# Altium PCB PCB2.PcbDoc (part 3 of 3)
Units mil, origin at the board's own origin, x right, y up, seen from the top; angles counter-clockwise.
Board outline 7874.02 x 7874.02 mil, 2 copper layers (Top Layer, Bottom Layer); 456 components, 298 nets, 1240 pads, 257 vias.
Unrouted connection lines stored in the file: 581.
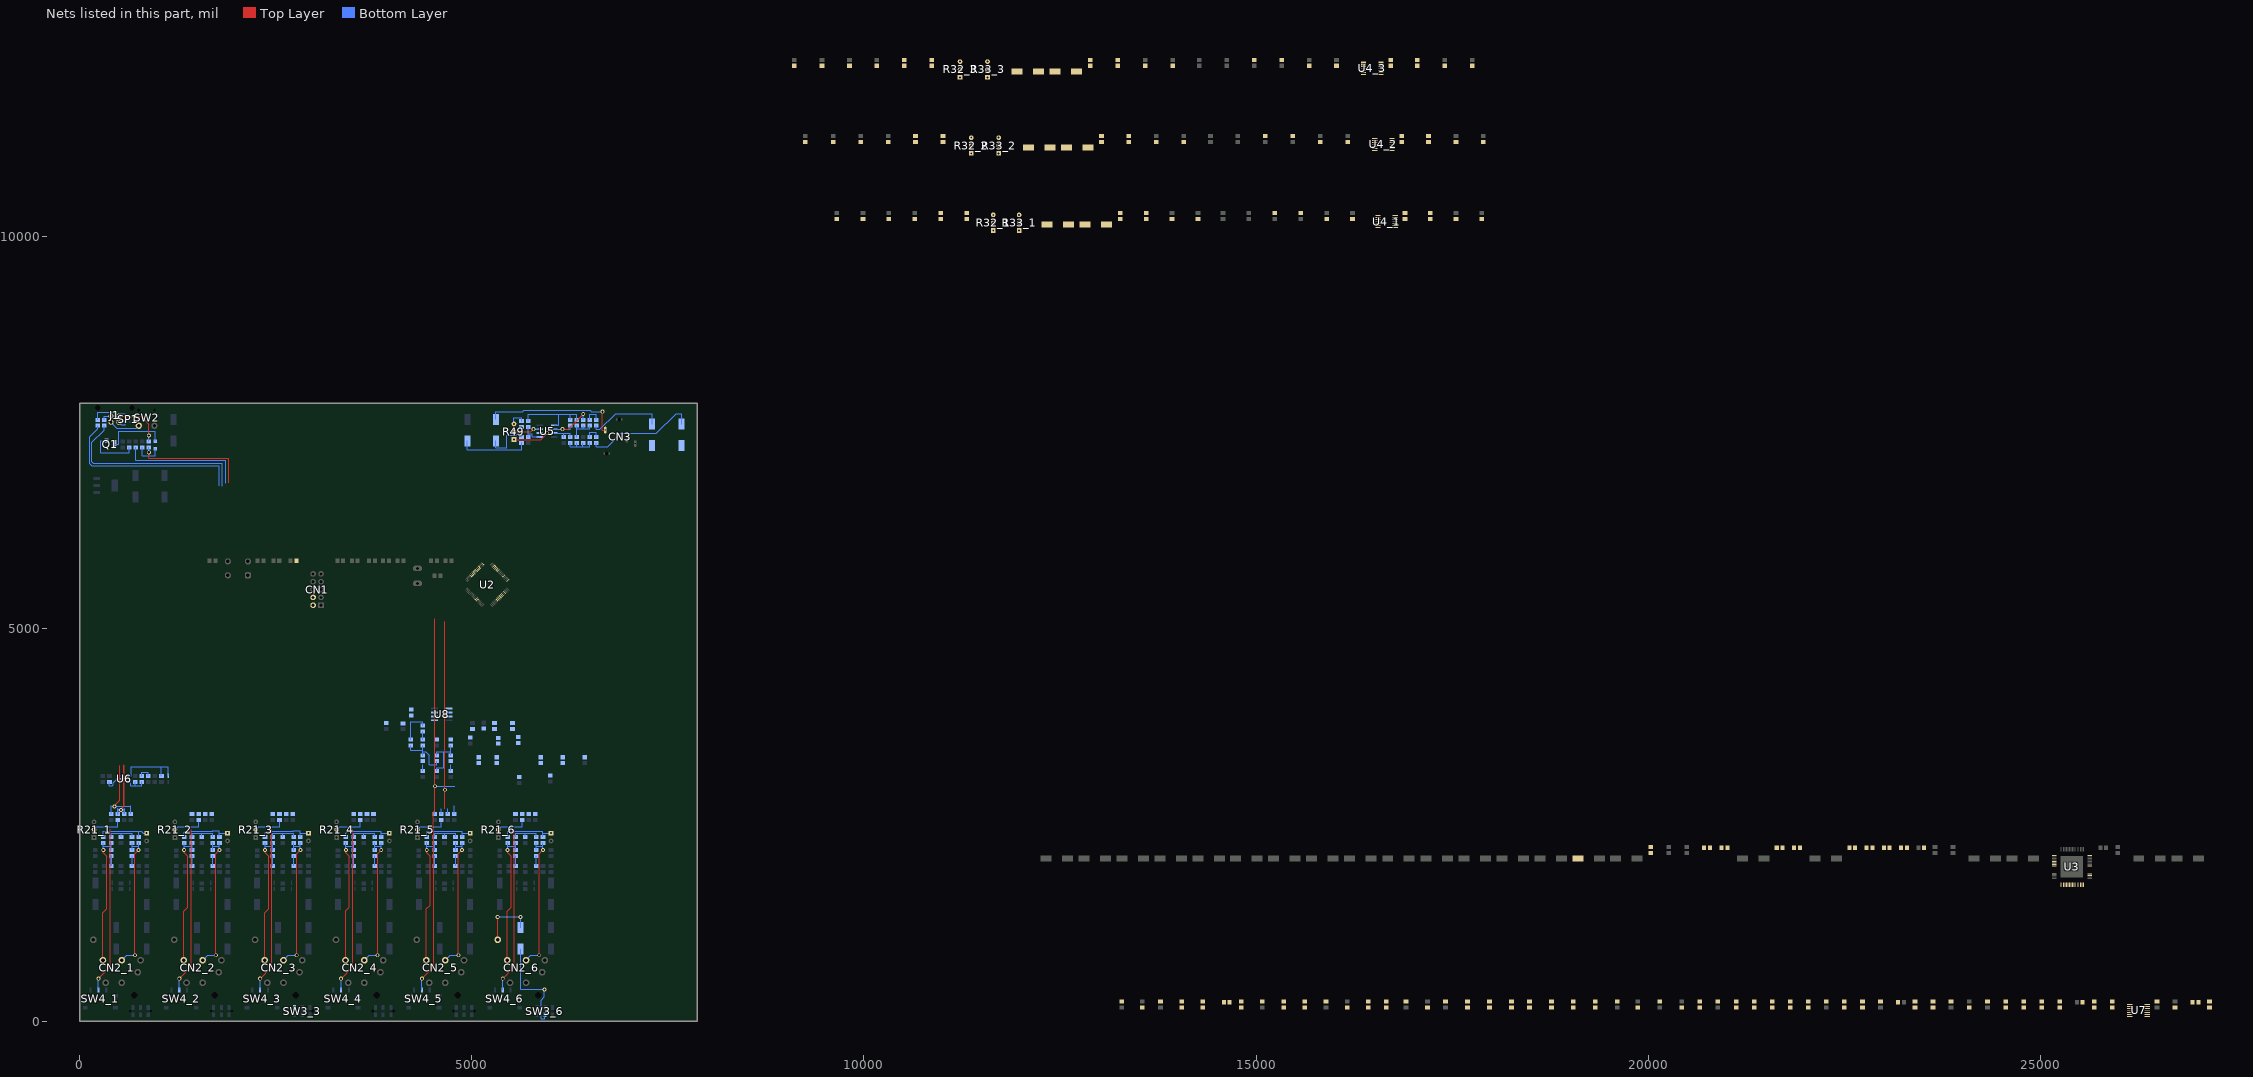
[diagram p3: the nets of this part, all layers, seen from the top]

## Via types
v1: diameter 50, hole 28, Top Layer to Bottom Layer, 253 vias
v2: diameter 55.12, hole 27.56, Top Layer to Bottom Layer, 4 vias

## Nets (pads, with @x,y where several pads share a name; then routed paths per layer and width w, separated by ;. In a path a pad name is that pad's centre, name@x,y a point inside that pad or via, vN(x,y) a via of type N, cw(c..) or ccw(c..) an arc to the next point about the centre after c; other vN are vias at no path point) (continued)
NetC48_6_1: C48_6.1 SW3_6.5 | length 1310.5
  Bottom Layer w15: C48_6.1@5622.54,916.15 5622.54,656.99 5622.54,403.54 v1(5927.66,403.54) 5927.66,310.04 5883.37,265.75 5883.37,29.53 5932.58,29.53 SW3_6.5@5932.58,80.71
NetC48_6_2: C48_6.2 CN2_6.T | length 722
  Top Layer w15: CN2_6.T@5330.81,1036.28 v1(5330.81,1327.37) v1@5332.2,1328.75
  Bottom Layer w15: v1@5332.2,1328.75 v1(5622.54,1328.75) C48_6.2@5622.54,1190.15
NetC49_1_1: C49_1.1 R23_1.2 U2.22 | length 803
  Top Layer w20: v1(529.03,2691.9) 529.03,2704.23 561.02,2736.22 561.02,3260.33
  Bottom Layer w20: R23_1.2@487.2,2639.86 487.2,2704.23 499.54,2691.9 v1(529.03,2691.9) 558.53,2691.9 570.87,2704.23 C49_1.1@570.87,2641.14
NetC49_2_1: C49_2.1 R23_2.2 U2.58
NetC49_3_1: C49_3.1 R23_3.2 U2.26
NetC49_4_1: C49_4.1 R23_4.2 U2.27
NetC49_5_1: C49_5.1 R23_5.2 U2.55 | length 2516.7
  Top Layer w15: 4653.05,2704.23 4653.05,5093.5
  Bottom Layer w15: R23_5.2@4611.22,2639.86 4611.22,2704.23 ; C49_5.1@4694.88,2641.14 4694.88,2704.23
  other v1: 4657.42,2949.31
NetC49_6_1: C49_6.1 R23_6.2 U2.25
NetC50_1_1: C50_1.1 R22_1.1 SW4_1.2 U2.59 | length 3132.6
  Top Layer w15: v1(240.55,540.75) 383.86,684.06 383.86,2445.87 ; v1(445.37,2736.19) 445.37,2748.52 514.27,2817.42 514.27,3255.41
  Bottom Layer w10: SW4_1.2@240.55,397.64 240.55,472.44
  Bottom Layer w15: 240.55,472.44 v1(240.55,540.75) ; R22_1.1@403.54,2639.86 403.54,2748.52 415.88,2736.19 v1(445.37,2736.19) 642.19,2736.19 654.53,2748.52 C50_1.1@654.53,2641.14
NetC50_2_1: C50_2.1 R22_2.1 SW4_2.2 U2.23 | length 2107.6
  Top Layer w15: v1(1271.56,540.75) 1414.86,684.06 1414.86,2445.87
  Bottom Layer w10: SW4_2.2@1271.56,397.64 1271.56,472.44
  Bottom Layer w15: 1271.56,472.44 v1(1271.56,540.75)
NetC50_3_1: C50_3.1 R22_3.1 SW4_3.2 U2.57 | length 2107.6
  Top Layer w15: v1(2302.56,540.75) 2445.87,684.06 2445.87,2445.87
  Bottom Layer w10: SW4_3.2@2302.56,397.64 2302.56,472.44
  Bottom Layer w15: 2302.56,472.44 v1(2302.56,540.75)
NetC50_4_1: C50_4.1 R22_4.1 SW4_4.2 U2.56 | length 2107.6
  Top Layer w15: v1(3333.56,540.75) 3476.87,684.06 3476.87,2445.87
  Bottom Layer w10: SW4_4.2@3333.56,397.64 3333.56,472.44
  Bottom Layer w15: 3333.56,472.44 v1(3333.56,540.75)
NetC50_5_1: C50_5.1 R22_5.1 SW4_5.2 U2.24 | length 5267.8
  Top Layer w15: v1(4364.57,540.75) 4507.87,684.06 4507.87,2445.87 4507.87,2659.94 4527.26,2679.33 4527.26,2748.52 4527.26,5130.71
  Bottom Layer w10: SW4_5.2@4364.57,397.64 4364.57,472.44
  Bottom Layer w15: 4364.57,472.44 v1(4364.57,540.75) ; R22_5.1@4527.26,2639.86 4527.26,2748.52 ; v1(4531.63,2993.6) 4782.91,2993.6 ; C50_5.1@4778.54,2641.14 4778.54,2748.52
NetC50_6_1: C50_6.1 R22_6.1 SW4_6.2 U2.54 | length 2107.6
  Top Layer w15: v1(5395.57,540.75) 5538.88,684.06 5538.88,2445.87
  Bottom Layer w10: SW4_6.2@5395.57,397.64 5395.57,472.44
  Bottom Layer w15: 5395.57,472.44 v1(5395.57,540.75)
NetC51_1_1: C51_1.1 R26_1.1 U4_1.1
NetC51_2_1: C51_2.1 R26_2.1 U4_2.1
NetC51_3_1: C51_3.1 R26_3.1 U4_3.1
NetC52_1_1: C52_1.1 R27_1.1 U4_1.7
NetC52_2_1: C52_2.1 R27_2.1 U4_2.7
NetC52_3_1: C52_3.1 R27_3.1 U4_3.7
NetC55_1_1: C55_1.1 R36_1.1 U4_1.8
NetC55_1_2: C55_1.2 R30_1.1 R32_1.3 U4_1.9
NetC55_2_1: C55_2.1 R36_2.1 U4_2.8
NetC55_2_2: C55_2.2 R30_2.1 R32_2.3 U4_2.9
NetC55_3_1: C55_3.1 R36_3.1 U4_3.8
NetC55_3_2: C55_3.2 R30_3.1 R32_3.3 U4_3.9
NetC56_1_1: C56_1.1 R37_1.1 U4_1.14
NetC56_1_2: C56_1.2 R31_1.1 R33_1.3 U4_1.13
NetC56_2_1: C56_2.1 R37_2.1 U4_2.14
NetC56_2_2: C56_2.2 R31_2.1 R33_2.3 U4_2.13
NetC56_3_1: C56_3.1 R37_3.1 U4_3.14
NetC56_3_2: C56_3.2 R31_3.1 R33_3.3 U4_3.13
NetC57_1_1: C57_1.1 R34_1.1
NetC57_1_2: C57_1.2 R84.2
NetC57_2_1: C57_2.1 R34_2.1
NetC57_2_2: C57_2.2 R106.2
NetC57_3_1: C57_3.1 R34_3.1
NetC57_3_2: C57_3.2 R128.2
NetC58_1_1: C58_1.1 R35_1.1
NetC58_1_2: C58_1.2 R95.2
NetC58_2_1: C58_2.1 R35_2.1
NetC58_2_2: C58_2.2 R117.2
NetC58_3_1: C58_3.1 R35_3.1
NetC58_3_2: C58_3.2 R139.2
NetC61_1: C61.1 R38.2 R42.1 U5.1 | length 1055
  Bottom Layer w15: R42.1@5718.51,7650.59 5718.51,7739.26 6107.28,7739.26 ; U5.1@6052.65,7597.15 6108.46,7597.15 6108.46,7738.08 6107.28,7739.26 ; C61.1@6254.92,7665.35 6254.92,7739.26 ; R38.2@6338.58,7665.35 6338.58,7739.26 6254.92,7739.26 ; 6107.28,7739.26 6254.92,7739.26
NetC61_2: C61.2 R41.2 U5.2 | length 661.8
  Top Layer w15: v1(6158.96,7546.75) 6230.31,7546.75 v1(6422.24,7738.68)
  Bottom Layer w15: U5.2@6052.65,7547.15 6254.92,7547.15 C61.2@6254.92,7590.55 ; R41.2@6422.24,7665.35 v1(6422.24,7738.68)
NetC62_1: C62.1 R39.1 | length 974.6
  Bottom Layer w15: R39.1@6589.57,7590.55 6589.57,7544.29 6631.4,7544.29 6833.17,7746.06 7300.69,7746.06 C62.1@7300.69,7612.39
NetC62_2: C62.2 U3.31
NetC63_1: C63.1 R38.1 R40.2 R41.1 | length 389.3
  Bottom Layer w15: C63.1@6338.58,7446.36 6338.58,7544.29 ; R38.1@6338.58,7590.55 6338.58,7549.21 6422.24,7549.21 ; R41.1@6422.24,7590.55 6422.24,7549.21 ; R40.2@6505.91,7590.55 6505.91,7549.21 6422.24,7549.21
NetC63_2: C63.2 R44.2 R45.1 R48.2 | length 438.1
  Bottom Layer w15: R45.1@6254.92,7371.56 6254.92,7325.3 6338.58,7325.3 ; C63.2@6338.58,7371.56 6338.58,7325.3 ; R48.2@6422.24,7371.56 6417.32,7366.63 6417.32,7325.3 ; R44.2@6505.91,7371.56 6505.91,7325.3 6417.32,7325.3 ; 6338.58,7325.3 6417.32,7325.3
NetC64_1: C64.1 R46.2 | length 644.2
  Bottom Layer w15: C64.1@5307.58,7397.45 5307.58,7308.47 5445.37,7308.47 5445.37,7467.26 5567.66,7467.26 5634.84,7534.45 R46.2@5634.84,7575.79
NetC64_2: C64.2 CN3.5 | length 1739.8
  Top Layer w15: v1(6667.23,7769.28) 6667.23,7535.52 CN3.5@6702.92,7535.52
  Bottom Layer w15: C64.2@5307.58,7671.45 5307.58,7769.28 5647.49,7769.28 5662.97,7784.76 6509.04,7784.76 6524.52,7769.28 v1(6667.23,7769.28)
NetC65_1: C65.1 R43.1 | length 1438.3
  Bottom Layer w15: R43.1@6589.57,7371.56 6589.57,7325.3 6734.74,7325.3 6902.07,7492.62 7354.82,7492.62 7605.81,7743.6 7674.71,7743.6 C65.1@7674.71,7609.93
NetC65_2: C65.2 U3.32
NetC66_1: C66.1 R45.2 U5.3 | length 303.8
  Bottom Layer w15: U5.3@6052.65,7497.15 6171.26,7497.15 ; C66.1@6171.26,7446.36 6171.26,7497.15 ; R45.2@6254.92,7446.36 6254.92,7497.15 6171.26,7497.15
NetC67_1: C67.1 R50.1 | length 892.4
  Bottom Layer w15: C67.1@4944.49,7397.45 4944.49,7283.47 5634.84,7283.47 R50.1@5634.84,7371.56
NetC70_1: C70.1 U6.5 | length 241.8
  Bottom Layer w15: C70.1@381.4,3049.81 381.4,3001.01 414.36,3001.01 428.34,3014.99 428.34,3037.13 480.9,3089.69 U6.5@524.69,3089.69
NetC71_1: C71.1 R78.2 R79.2 R80.1 R84.1 U7.1
NetC71_2: C71.2 R83.2 U7.2
NetC72_1: C72.1 R78.1 R82.2 R83.1
NetC72_2: C72.2 R86.2 R87.1 R88.2
NetC73_1: C73.1 R87.2 U7.3
NetC74_1: C74.1 R89.2 R90.2 R91.1 R95.1 U7.7
NetC74_2: C74.2 R94.2 U7.6
NetC75_1: C75.1 R89.1 R93.2 R94.1
NetC75_2: C75.2 R98.2 R99.1 R100.2
NetC76_1: C76.1 R96.2 R101.2 R102.1 R106.1 U7.8
NetC76_2: C76.2 R105.2 U7.9
NetC77_1: C77.1 R99.2 U7.5
NetC78_1: C78.1 R96.1 R104.2 R105.1
NetC78_2: C78.2 R108.2 R109.1 R110.2
NetC79_1: C79.1 R109.2 U7.10
NetC80_1: C80.1 R111.2 R112.2 R113.1 R117.1 U7.14
NetC80_2: C80.2 R116.2 U7.13
NetC81_1: C81.1 R111.1 R115.2 R116.1
NetC81_2: C81.2 R119.2 R120.1 R121.2
NetC82_1: C82.1 R120.2 U7.12
NetC83_1: C83.1 R122.2 R123.2 R124.1 R128.1 U8.1 | length 429.2
  Bottom Layer w15: R122.2@4224.76,3587.11 4224.76,3815.45 4376.91,3815.45 C83.1@4376.91,3766.73
NetC83_2: C83.2 R127.2 U8.2 | length 104.8
  Bottom Layer w15: R127.2@4376.91,3587.11 C83.2@4376.91,3691.93
NetC84_1: C84.1 R122.1 R126.2 R127.1 | length 696.1
  Bottom Layer w15: R122.1@4224.76,3512.3 4224.76,3451.28 4376.91,3451.28 ; R126.2@4376.91,3387.8 4376.91,3434.05 ; R127.1@4376.91,3512.3 4376.91,3451.28 ; C84.1@4554.07,3312.99 4554.07,3269.19 4460.57,3269.19 4460.57,3387.3 4413.82,3434.05 4376.91,3434.05 ; 4376.91,3434.05 4376.91,3451.28
NetC84_2: C84.2 R130.2 R131.1 R132.2 | length 689.5
  Bottom Layer w15: R132.2@4554.07,3188.48 4554.07,3232.28 4645.12,3232.28 4645.12,3436.52 ; C84.2@4554.07,3387.8 4554.07,3436.52 4645.12,3436.52 ; R130.2@4731.24,3387.8 4731.24,3436.52 ; R131.1@4731.24,3512.3 4731.24,3436.52 ; 4645.12,3436.52 4731.24,3436.52
NetC85_1: C85.1 R131.2 U8.3
NetC86_1: C86.1 R133.2 R134.2 R135.1 R139.1 U8.7
NetC86_2: C86.2 R138.2 U8.6
NetC87_1: C87.1 R133.1 R137.2 R138.1
NetC87_2: C87.2 R141.2 R142.1 R143.2
NetC88_1: C88.1 R142.2 U8.5
NetC89_1_1: C89_1.1 C90_1.1 CN2_1.2 R145_1.2 | length 1728.8
  Top Layer w15: CN2_1.2@297.8,776.28 297.8,1382.93 346.95,1432.09 346.95,2098.92 302.66,2143.21 v1(302.66,2182.58)
  Bottom Layer w15: v1(302.66,2182.58) 302.66,2226.07 ; R145_1.2@302.66,2272.83 302.66,2226.07 ; v1@305.12,2182.58 v1@305.11,2182.72 ; C89_1.1@403.54,2180.31 403.54,2226.07 ; C90_1.1@403.54,2272.83 403.54,2226.07 ; 302.66,2226.07 403.54,2226.07
NetC89_1_2: C89_1.2 R144_1.2 | length 127.5
  Bottom Layer w20: R144_1.2@403.54,1978.04 C89_1.2@403.54,2105.5
NetC89_2_1: C89_2.1 C90_2.1 CN2_2.2 R145_2.2 | length 1728.4
  Top Layer w15: CN2_2.2@1328.8,776.28 1328.8,1400.16 1377.95,1449.31 1377.95,2098.92 1333.66,2143.21 v1(1333.66,2182.58)
  Bottom Layer w15: v1(1333.66,2182.58) 1333.66,2226.07 ; R145_2.2@1333.66,2272.83 1333.66,2226.07 ; C89_2.1@1434.25,2180.31 1434.25,2226.07 ; C90_2.1@1434.25,2272.83 1434.25,2226.07 ; 1333.66,2226.07 1434.25,2226.07
NetC89_2_2: C89_2.2 R144_2.2 | length 127.5
  Bottom Layer w15: R144_2.2@1434.25,1978.04 C89_2.2@1434.25,2105.5
NetC89_3_1: C89_3.1 C90_3.1 CN2_3.2 R145_3.2 | length 1728.4
  Top Layer w15: CN2_3.2@2359.8,776.28 2359.8,1382.93 2408.96,1432.09 2408.96,2098.92 2364.67,2143.21 v1(2364.67,2182.58)
  Bottom Layer w15: v1(2364.67,2182.58) 2364.67,2226.07 ; R145_3.2@2364.67,2272.83 2364.67,2226.07 ; C89_3.1@2465.26,2180.31 2465.26,2226.07 ; C90_3.1@2465.26,2272.83 2465.26,2226.07 ; 2364.67,2226.07 2465.26,2226.07
NetC89_3_2: C89_3.2 R144_3.2 | length 127.5
  Bottom Layer w15: R144_3.2@2465.26,1978.04 C89_3.2@2465.26,2105.5
NetC89_4_1: C89_4.1 C90_4.1 CN2_4.2 R145_4.2 | length 1728.4
  Top Layer w15: CN2_4.2@3390.81,776.28 3390.81,1405.08 3439.96,1454.23 3439.96,2098.92 3395.67,2143.21 v1(3395.67,2182.58)
  Bottom Layer w15: v1(3395.67,2182.58) 3395.67,2226.07 ; R145_4.2@3395.67,2272.83 3395.67,2226.07 ; C89_4.1@3496.26,2180.31 3496.26,2226.07 ; C90_4.1@3496.26,2272.83 3496.26,2226.07 ; 3395.67,2226.07 3496.26,2226.07
NetC89_4_2: C89_4.2 R144_4.2 | length 127.5
  Bottom Layer w15: R144_4.2@3496.26,1978.04 C89_4.2@3496.26,2105.5
NetC89_5_1: C89_5.1 C90_5.1 CN2_5.2 R145_5.2 | length 1728.4
  Top Layer w15: CN2_5.2@4421.81,776.28 4421.81,1429.68 4470.96,1478.84 4470.96,2098.92 4426.67,2143.21 v1(4426.67,2182.58)
  Bottom Layer w15: v1(4426.67,2182.58) 4426.67,2226.07 ; R145_5.2@4426.67,2272.83 4426.67,2226.07 ; C89_5.1@4527.26,2180.31 4527.26,2226.07 ; C90_5.1@4527.26,2272.83 4527.26,2226.07 ; 4426.67,2226.07 4527.26,2226.07
NetC89_5_2: C89_5.2 R144_5.2 | length 127.5
  Bottom Layer w15: R144_5.2@4527.26,1978.04 C89_5.2@4527.26,2105.5
NetC89_6_1: C89_6.1 C90_6.1 CN2_6.2 R145_6.2 | length 1731.8
  Top Layer w15: CN2_6.2@5452.81,776.28 5452.81,1402.62 5501.97,1451.77 5501.97,2098.92 5457.68,2143.21 v1(5457.68,2182.58) v1@5460.14,2180.12
  Bottom Layer w15: v1(5457.68,2182.58) 5457.68,2226.07 ; R145_6.2@5457.68,2272.83 5457.68,2226.07 ; C89_6.1@5558.27,2180.31 5558.27,2226.07 ; C90_6.1@5558.27,2272.83 5558.27,2226.07 ; 5457.68,2226.07 5558.27,2226.07
NetC89_6_2: C89_6.2 R144_6.2 | length 127.5
  Bottom Layer w15: R144_6.2@5558.27,1978.04 C89_6.2@5558.27,2105.5
NetC90_1_2: C90_1.2 C91_1.1 C92_1.1 | length 405.4
  Bottom Layer w15: C90_1.2@403.54,2347.63 403.54,2394.19 529.04,2394.19 ; C91_1.1@529.04,2347.63 529.04,2394.19 ; C92_1.1@669.29,2347.63 669.29,2394.19 529.04,2394.19
NetC90_2_2: C90_2.2 C91_2.1 C92_2.1 | length 405.7
  Bottom Layer w15: C90_2.2@1434.25,2347.63 1434.25,2394.19 1560.04,2394.19 ; C91_2.1@1560.04,2347.63 1560.04,2394.19 ; C92_2.1@1700.3,2347.63 1700.3,2394.19 1560.04,2394.19
NetC90_3_2: C90_3.2 C91_3.1 C92_3.1 | length 405.7
  Bottom Layer w15: C90_3.2@2465.26,2347.63 2465.26,2394.19 2591.04,2394.19 ; C91_3.1@2591.04,2347.63 2591.04,2394.19 ; C92_3.1@2731.3,2347.63 2731.3,2394.19 2591.04,2394.19
NetC90_4_2: C90_4.2 C91_4.1 C92_4.1 | length 398.4
  Bottom Layer w15: C90_4.2@3496.26,2347.63 3496.26,2391.73 3622.05,2391.73 ; C91_4.1@3622.05,2347.63 3622.05,2391.73 ; C92_4.1@3762.3,2347.63 3762.3,2391.73 3622.05,2391.73
NetC90_5_2: C90_5.2 C91_5.1 C92_5.1 | length 398.2
  Bottom Layer w15: C90_5.2@4527.26,2347.63 4527.26,2391.44 4527.56,2391.73 4653.05,2391.73 ; C91_5.1@4653.05,2347.63 4653.05,2391.73 ; C92_5.1@4793.31,2347.63 4793.31,2391.73 4653.05,2391.73
NetC90_6_2: C90_6.2 C91_6.1 C92_6.1 | length 398.4
  Bottom Layer w15: C90_6.2@5558.27,2347.63 5558.27,2391.73 5684.06,2391.73 ; C91_6.1@5684.06,2347.63 5684.06,2391.73 ; C92_6.1@5824.31,2347.63 5824.31,2391.73 5684.06,2391.73
NetC92_1_2: C92_1.2 C93_1.1 CN2_1.3 R146_1.1 | length 1826.2
  Top Layer w15: v1(706.2,839.07) 706.2,2135.83 v1(752.95,2182.58)
  Bottom Layer w15: CN2_1.3@537.8,776.28 600.59,839.07 v1(706.2,839.07) ; C93_1.1@669.29,2180.31 669.29,2226.57 ; C92_1.2@669.29,2272.83 669.29,2226.57 ; v1@752.95,2180.12 v1(752.95,2182.58) 752.95,2226.57 ; R146_1.1@752.95,2272.83 752.95,2226.57 ; 669.29,2226.57 752.95,2226.57
NetC92_2_2: C92_2.2 C93_2.1 CN2_2.3 R146_2.1 | length 1826.2
  Top Layer w15: v1(1737.2,839.07) 1737.2,2135.83 v1(1783.96,2182.58)
  Bottom Layer w15: CN2_2.3@1568.8,776.28 1631.59,839.07 v1(1737.2,839.07) ; C93_2.1@1700.3,2180.31 1700.3,2226.57 ; C92_2.2@1700.3,2272.83 1700.3,2226.57 ; v1@1783.96,2180.12 v1(1783.96,2182.58) 1783.96,2226.57 ; R146_2.1@1783.96,2272.83 1783.96,2226.57 ; 1700.3,2226.57 1783.96,2226.57
NetC92_3_2: C92_3.2 C93_3.1 CN2_3.3 R146_3.1 | length 1826.2
  Top Layer w15: v1(2768.21,839.07) 2768.21,2135.83 v1(2814.96,2182.58)
  Bottom Layer w15: CN2_3.3@2599.8,776.28 2662.59,839.07 v1(2768.21,839.07) ; C93_3.1@2731.3,2180.31 2731.3,2226.57 ; C92_3.2@2731.3,2272.83 2731.3,2226.57 ; v1@2814.96,2180.12 v1(2814.96,2182.58) 2814.96,2226.57 ; R146_3.1@2814.96,2272.83 2814.96,2226.57 ; 2731.3,2226.57 2814.96,2226.57
NetC92_4_2: C92_4.2 C93_4.1 CN2_4.3 R146_4.1 | length 1826.2
  Top Layer w15: v1(3799.21,839.07) 3799.21,2135.83 v1(3845.96,2182.58)
  Bottom Layer w15: CN2_4.3@3630.81,776.28 3693.6,839.07 v1(3799.21,839.07) ; C93_4.1@3762.3,2180.31 3762.3,2226.57 ; C92_4.2@3762.3,2272.83 3762.3,2226.57 ; v1@3845.96,2180.12 v1(3845.96,2182.58) 3845.96,2226.57 ; R146_4.1@3845.96,2272.83 3845.96,2226.57 ; 3762.3,2226.57 3845.96,2226.57
NetC92_5_2: C92_5.2 C93_5.1 CN2_5.3 R146_5.1 | length 1826.2
  Top Layer w15: v1(4830.22,839.07) 4830.22,2135.83 v1(4876.97,2182.58)
  Bottom Layer w15: CN2_5.3@4661.81,776.28 4724.6,839.07 v1(4830.22,839.07) ; C93_5.1@4793.31,2180.31 4793.31,2226.57 ; C92_5.2@4793.31,2272.83 4793.31,2226.57 ; v1@4876.97,2180.12 v1(4876.97,2182.58) 4876.97,2226.57 ; R146_5.1@4876.97,2272.83 4876.97,2226.57 ; 4793.31,2226.57 4876.97,2226.57
NetC92_6_2: C92_6.2 C93_6.1 CN2_6.3 R146_6.1 | length 1826.2
  Top Layer w15: v1(5861.22,839.07) 5861.22,2135.83 v1(5907.97,2182.58)
  Bottom Layer w15: CN2_6.3@5692.81,776.28 5755.61,839.07 v1(5861.22,839.07) ; C93_6.1@5824.31,2180.31 5824.31,2226.57 ; C92_6.2@5824.31,2272.83 5824.31,2226.57 ; v1@5907.97,2180.12 v1(5907.97,2182.58) 5907.97,2226.57 ; R146_6.1@5907.97,2272.83 5907.97,2226.57 ; 5824.31,2226.57 5907.97,2226.57
NetC93_1_2: C93_1.2 R147_1.2 | length 127.5
  Bottom Layer w15: R147_1.2@669.29,1978.04 C93_1.2@669.29,2105.5
NetC93_2_2: C93_2.2 R147_2.2 | length 127.5
  Bottom Layer w15: R147_2.2@1700.3,1978.04 C93_2.2@1700.3,2105.5
NetC93_3_2: C93_3.2 R147_3.2 | length 127.5
  Bottom Layer w15: R147_3.2@2731.3,1978.04 C93_3.2@2731.3,2105.5
NetC93_4_2: C93_4.2 R147_4.2 | length 127.5
  Bottom Layer w15: R147_4.2@3762.3,1978.04 C93_4.2@3762.3,2105.5
NetC93_5_2: C93_5.2 R147_5.2 | length 127.5
  Bottom Layer w15: R147_5.2@4793.31,1978.04 C93_5.2@4793.31,2105.5
NetC93_6_2: C93_6.2 R147_6.2 | length 127.5
  Bottom Layer w15: R147_6.2@5824.31,1978.04 C93_6.2@5824.31,2105.5
NetCN1_2: CN1.2 U2.49
NetCN1_4: CN1.4 U2.46
NetD1_1: D1.1 Q1.3 | length 810
  Bottom Layer w15: Q1.3@444.89,7354.83 497.05,7354.83 497.05,7519.69 964.57,7519.69 D1.1@964.57,7394.19
NetD1_2: D1.2 R2.1 | length 362
  Bottom Layer w15: R2.1@799.6,7315.65 799.6,7207.19 964.57,7207.19 D1.2@964.57,7295.77
NetD2_2: D2.2 L1.2 U6.1 | length 869.3
  Bottom Layer w10: D2.2@1129.43,3127.46 1129.43,3244.22
  Bottom Layer w15: U6.1@614.69,3127.09 656.58,3127.09 656.58,3244.22 1043.89,3244.22 ; L1.2@1043.89,3124.14 1044.56,3124.81 1044.56,3243.55 1043.89,3244.22 ; 1129.43,3244.22 1043.89,3244.22
NetJ1_1: J1.1 SW2.1 | length 399
  Bottom Layer w15: J1.1@400.59,7634.45 475.98,7559.06 724.11,7559.06 SW2.1@755.41,7590.35
NetJ1_2: J1.2 R5.1 SP1.2 | length 595.3
  Bottom Layer w15: R5.1@231.3,7665.35 231.3,7762.19 449.59,7762.19 449.59,7683.88 J1.2@499.02,7634.45 530.12,7603.35 582.68,7603.35 SP1.2@582.68,7638.78
NetJ1_3: J1.3 R6.1 SP1.3 | length 777
  Top Layer w15: J1.3@499.02,7713.19 778.44,7713.19 883.37,7608.27 v1(883.37,7465.55)
  Bottom Layer w15: J1.3@499.02,7713.19 526.97,7741.14 582.68,7741.14 SP1.3@582.68,7705.71 ; R6.1@883.37,7389.76 v1(883.37,7465.55)
NetJ1_4: J1.4 R7.1 | length 133.5
  Bottom Layer w15: R7.1@314.96,7665.35 314.96,7713.19 J1.4@400.59,7713.19
NetQ1_1: Q1.1 R3.1 | length 658.5
  Bottom Layer w15: Q1.1@342.52,7398.14 270.67,7398.14 270.67,7244.09 632.38,7244.09 R3.1@632.38,7314.96
NetR1_2: R1.2 U2.60
NetR4_2: R4.2 U2.42 | length 1602.1
  Bottom Layer w15: R4.2@716.05,7315.65 716.05,7148.13 1862.69,7148.13 1862.69,6860.23
NetR5_2: R5.2 U2.44 | length 2449.2
  Bottom Layer w15: R5.2@231.3,7590.55 231.3,7551.67 127.95,7448.33 127.95,7106.3 152.56,7081.69 1783.96,7081.69 1783.96,6825.79
NetR6_2: R6.2 U2.45 | length 1468.5
  Top Layer w15: v1(883.37,7251.48) 883.37,7175.2 1899.61,7175.2 1899.61,6862.7
  Bottom Layer w15: v1(883.37,7251.48) R6.2@883.37,7314.96
NetR7_2: R7.2 U2.43 | length 2488.2
  Bottom Layer w15: R7.2@314.96,7590.55 314.96,7534.45 157.48,7376.97 157.48,7130.91 174.7,7113.68 1818.41,7113.68 1818.41,6818.41
NetR11_2: R11.2 U3.48
NetR12_1: R12.1 U3.35
NetR12_2: R12.2 R13.1 U2.33
NetR13_2: R13.2 U3.6
NetR14_1: R14.1 U3.36
NetR14_2: R14.2 R15.1 U2.29
NetR15_2: R15.2 U3.7
NetR16_1: R16.1 U3.41
NetR16_2: R16.2 U2.37
NetR17_1: R17.1 U2.10
NetR17_2: R17.2 U3.8
NetR18_1: R18.1 U3.37
NetR18_2: R18.2 U2.11
NetR19_1: R19.1 U2.52
NetR19_2: R19.2 U3.9
NetR20_1: R20.1 U3.38
NetR20_2: R20.2 U2.53
NetR21_1_2: R21_1.2 R23_1.1 | length 384.8
  Bottom Layer w15: R21_1.2@184.55,2440.06 219.88,2475.39 487.2,2475.39 R23_1.1@487.2,2542.91
NetR21_2_2: R21_2.2 R23_2.1 | length 384.8
  Bottom Layer w15: R21_2.2@1215.55,2440.06 1250.89,2475.39 1518.21,2475.39 R23_2.1@1518.21,2542.91
NetR21_3_2: R21_3.2 R23_3.1 | length 384.8
  Bottom Layer w15: R21_3.2@2246.55,2440.06 2281.89,2475.39 2549.21,2475.39 R23_3.1@2549.21,2542.91
NetR21_4_2: R21_4.2 R23_4.1 | length 384.8
  Bottom Layer w15: R21_4.2@3277.56,2440.06 3312.89,2475.39 3580.22,2475.39 R23_4.1@3580.22,2542.91
NetR21_5_2: R21_5.2 R23_5.1 | length 384.8
  Bottom Layer w15: R21_5.2@4308.56,2440.06 4343.9,2475.39 4611.22,2475.39 R23_5.1@4611.22,2542.91
NetR21_6_2: R21_6.2 R23_6.1 | length 384.8
  Bottom Layer w15: R21_6.2@5339.57,2440.06 5374.9,2475.39 5642.22,2475.39 R23_6.1@5642.22,2542.91
NetR32_1_1: R32_1.1 R32_1.2 R34_1.2
NetR32_2_1: R32_2.1 R32_2.2 R34_2.2
NetR32_3_1: R32_3.1 R32_3.2 R34_3.2
NetR33_1_1: R33_1.1 R33_1.2 R35_1.2
NetR33_2_1: R33_2.1 R33_2.2 R35_2.2
NetR33_3_1: R33_3.1 R33_3.2 R35_3.2
NetR39_2: R39.2 R40.1 | length 231.5
  Bottom Layer w15: R40.1@6505.91,7665.35 6505.91,7739.26 6589.57,7739.26 R39.2@6589.57,7665.35
NetR42_2: R42.2 R47.2 U5.5 | length 320.6
  Bottom Layer w15: R47.2@5718.51,7446.36 5718.51,7490.16 ; R42.2@5718.51,7575.79 5718.51,7490.16 ; U5.5@5866.65,7447.15 5770.18,7447.15 5770.18,7490.16 5718.51,7490.16
NetR43_2: R43.2 R44.1 | length 205.7
  Bottom Layer w15: R44.1@6505.91,7446.36 6505.91,7507.38 6589.57,7507.38 R43.2@6589.57,7446.36
NetR46_1: R46.1 R49.2 R49.3 U5.7 | length 670.5
  Top Layer w15: R49.3@5538.88,7614.76 R49.2@5538.88,7514.76 5753.02,7514.76 5784.91,7546.66 v1@5770.09,7546.66
  Bottom Layer w15: R49.3@5538.88,7614.76 5538.88,7691.93 5634.84,7691.93 R46.1@5634.84,7650.59 ; v1@5785.4,7547.15 5785.4,7546.66 v1(5787.37,7546.66) 5866.16,7546.66 U5.7@5866.65,7547.15
NetR49_1: R49.1 R50.2 U5.6 | length 553.1
  Top Layer w15: R49.1@5538.88,7414.76 5879.33,7414.76 v1(5962.11,7497.54)
  Bottom Layer w15: U5.6@5866.65,7497.15 5961.71,7497.15 v1(5962.11,7497.54)
NetR59_2: R103.1 SW3_3.3
NetR75_1: R75.1 R76.2 U6.3 | length 320.3
  Bottom Layer w15: U6.3@614.69,3052.29 655.11,3052.29 655.11,3003.08 708.8,3003.08 ; R75.1@708.8,3049.81 708.8,3003.08 ; R76.2@792.32,3049.81 792.32,3003.08 708.8,3003.08
NetR76_1: R76.1 R77.2 | length 175.2
  Bottom Layer w15: R76.1@792.32,3124.61 792.32,3170.4 875.98,3170.4 R77.2@875.98,3124.61
NetR81_2: R81.2 R82.1
NetR85_2: R85.2 R86.1
NetR92_2: R92.2 R93.1
NetR97_2: R97.2 R98.1
NetR103_2: R103.2 R104.1
NetR107_2: R107.2 R108.1
NetR114_2: R114.2 R115.1
NetR118_2: R118.2 R119.1
NetR125_2: R125.2 R126.1 | length 77.8
  Bottom Layer w15: R125.2@4376.91,3188.48 4376.91,3266.24
NetR129_2: R129.2 R130.1 | length 77.8
  Bottom Layer w15: R129.2@4731.24,3188.48 4731.24,3266.24
NetR136_2: R136.2 R137.1
NetR140_2: R140.2 R141.1
NetR145_1_1: R145_1.1 R146_1.2 SW5_1.1 | length 708.6
  Bottom Layer w15: R145_1.1@305.12,2347.63 305.12,2421.26 752.95,2421.26 ; R146_1.2@752.95,2347.63 752.95,2421.26 ; SW5_1.1@856.3,2396.65 809.55,2396.65 784.94,2421.26 752.95,2421.26
NetR145_2_1: R145_2.1 R146_2.2 SW5_2.1 | length 695.7
  Bottom Layer w15: R145_2.1@1333.66,2347.63 1333.66,2406.5 1350.49,2423.33 1695.89,2423.33 1696.28,2423.72 1783.96,2423.72 1783.96,2396.65 ; R146_2.2@1783.96,2347.63 1783.96,2396.65 ; SW5_2.1@1887.3,2396.65 1783.96,2396.65
NetR145_3_1: R145_3.1 R146_3.2 SW5_3.1 | length 691.4
  Bottom Layer w15: R145_3.1@2364.67,2347.63 2364.67,2399.11 2388.88,2423.33 2726.89,2423.33 2727.28,2423.72 2814.96,2423.72 2814.96,2396.65 ; R146_3.2@2814.96,2347.63 2814.96,2396.65 ; SW5_3.1@2918.31,2396.65 2814.96,2396.65
NetR145_4_1: R145_4.1 R146_4.2 SW5_4.1 | length 686.5
  Bottom Layer w15: R145_4.1@3395.67,2347.63 3395.67,2396.65 3420.28,2421.26 3845.96,2421.26 3845.96,2396.65 ; R146_4.2@3845.96,2347.63 3845.96,2396.65 ; SW5_4.1@3949.31,2396.65 3845.96,2396.65
NetR145_5_1: R145_5.1 R146_5.2 SW5_5.1 | length 696
  Bottom Layer w15: R145_5.1@4426.67,2347.63 4426.67,2418.8 4876.97,2418.8 4876.97,2396.65 ; R146_5.2@4876.97,2347.63 4876.97,2396.65 ; SW5_5.1@4980.31,2396.65 4876.97,2396.65
NetR145_6_1: R145_6.1 R146_6.2 SW5_6.1 | length 700.9
  Bottom Layer w15: R145_6.1@5457.68,2347.63 5457.68,2421.26 5907.97,2421.26 5907.97,2396.65 ; R146_6.2@5907.97,2347.63 5907.97,2396.65 ; SW5_6.1@6011.32,2396.65 5907.97,2396.65
NetU3_5: U3.5
NetU3_13: U3.13
NetU3_17: U3.17
NetU3_18: U3.18
NetU3_19: U3.19
NetU3_20: U3.20
NetU3_21: U3.21
NetU3_22: U3.22
NetU3_23: U3.23
NetU3_24: U3.24
NetU3_25: U3.25
NetU3_26: U3.26
NetU3_27: U3.27
NetU3_28: U3.28
NetU3_29: U3.29
NetU3_30: U3.30
VCOMAD: C31.1 C51_1.2 C51_2.2 C51_3.2 C52_1.2 C52_2.2 C52_3.2 C59_1.1 C59_2.1 C59_3.1 C60_1.1 C60_2.1 C60_3.1 R24_1.1 R24_2.1 R24_3.1 R25_1.1 R25_2.1 R25_3.1 R28_1.2 R28_2.2 R28_3.2 R29_1.2 R29_2.2 R29_3.2 U3.1 U4_1.2 U4_1.3 U4_1.5 U4_1.6 U4_1.10 U4_1.12 U4_2.2 U4_2.3 U4_2.5 U4_2.6 U4_2.10 U4_2.12 U4_3.2 U4_3.3 U4_3.5 U4_3.6 U4_3.10 U4_3.12
pads on no net: C27.1 C27.2 CN1.3 CN2_1.Mount CN2_2.Mount CN2_3.Mount CN2_4.Mount CN2_5.Mount CN2_6.Mount CN3.3 CN3.4 SW2.3 SW2.4 SW3_1.7 SW3_1.8 SW3_2.7 SW3_2.8 SW3_3.7 SW3_3.8 SW3_4.7 SW3_4.8 SW3_5.7 SW3_5.8 SW3_6.7 SW3_6.8 SW4_1.1 SW4_1.4 SW4_1.5 SW4_1.6 SW4_1.7 SW4_2.1 SW4_2.4 SW4_2.5 SW4_2.6 SW4_2.7 SW4_3.1 SW4_3.4 SW4_3.5 SW4_3.6 SW4_3.7 SW4_4.1 SW4_4.4 SW4_4.5 SW4_4.6 SW4_4.7 SW4_5.1 SW4_5.4 SW4_5.5 SW4_5.6 SW4_5.7 SW4_6.1 SW4_6.4 SW4_6.5 SW4_6.6 SW4_6.7 U1.2 U2.2 U2.3 U2.4 U2.8 U2.9 U2.14 U2.15 U2.16 U2.17 U2.20 U2.21 U2.28 U2.34 U2.35 U2.36 U2.38 U2.39 U2.40 U2.41 U2.50 U2.51 U2.61 U2.62 U3.10

## Other copper
Top Layer:
  region net NetC17_5_1: 4372.54,2620.57
Bottom Layer:
  region net 5V: 453.34,2976.01
  region net NetC50_1_1: 351.87,3086.72

## Silkscreen, mask and mechanical layers (free items; w line width, h text height)
Mechanical 1:
  lines w5: 0,0 7874.02,0 7874.02,3937.01 7874.02,7874.02 0,7874.02 0,3937.01 0,0 ; 19.68,19.68 7854.33,19.68 7854.33,3917.32 7854.33,7854.33 19.68,7854.33 19.68,3917.32 19.68,19.68